# Altium PCB InfoDisplayPreAutoRoute.PcbDoc
Units mil, origin at the board's own origin, x right, y up, seen from the top; angles counter-clockwise.
Board outline 4606.3 x 1692.91 mil, 2 copper layers (Top Layer, Bottom Layer); 149 components, 160 nets, 533 pads, 74 vias.
Unrouted connection lines stored in the file: 27.
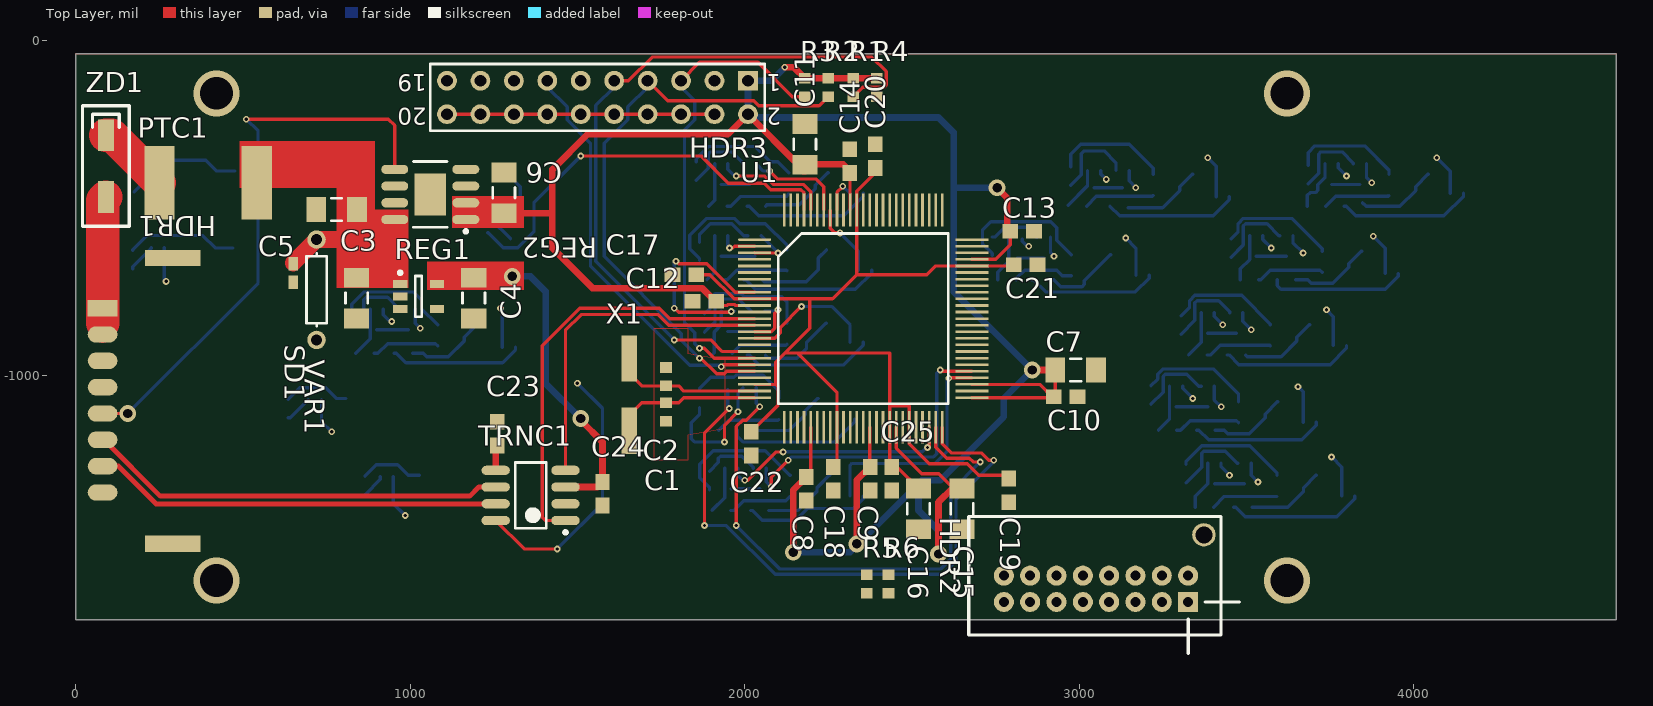
[diagram p0: Top Layer view]
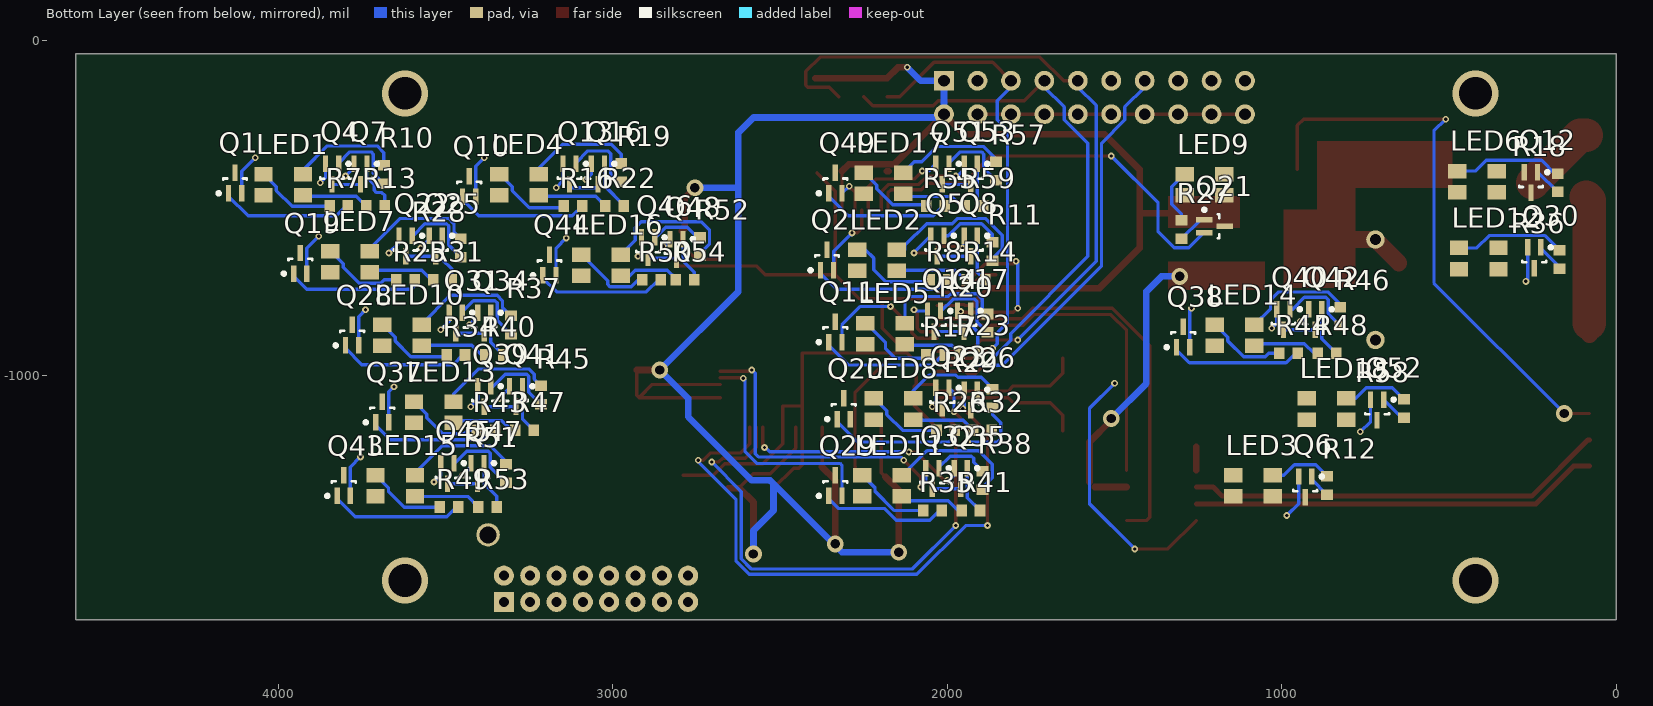
[diagram p1: Bottom Layer view, seen from below]

## Layer stack, top to bottom
Top Solder: solder mask 0.4, Solder Resist, Dk 3.5
Top Layer: signal copper 1.4
Dielectric 1: dielectric 12.6, FR-4, Dk 4.8
Bottom Layer: signal copper 1.4
Bottom Solder: solder mask 0.4, Solder Resist, Dk 3.5

## Board outline
0,-39.37 4606.3,-39.37 4606.3,-75 4606.3,-1732.28 0,-1732.28

## Design rules (kind name [scope] priority, off if disabled: settings)
Clearance [All] p1: gap=6
DiffPairsRouting [All] p1: maxlimit=10 minlimit=10 mostfreqgap=10 toplayer_minwidth=15 toplayer_maxwidth=15 toplayer_prefwidth=15 bottomlayer_minwidth=15 bottomlayer_maxwidth=15 bottomlayer_prefwidth=15 maxuncoupledlength=500
PolygonConnect [All] p1: connectstyle=Direct reliefconductorwidth=10 reliefentries=4 polygonreliefangle="90 Angle" airgapwidth=10
RoutingVias [All] p1: holewidth=10 width=20 viastyle="Through Hole" minholewidth=10 minwidth=20 maxholewidth=500 maxwidth=450
SolderMaskExpansion [All] p1: expansion=4
Width [All] p1: maxlimit=100 minlimit=10 preferedwidth=10
28 further rules are at their usual default settings.

## Classes and differential pairs
component class InfoDisplay: C1 C2 C3 C4 C5 C6 C7 C8 C9 C10 C11 C12 C13 C14 C15 C16 C17 C18 C19 C20 C21 C22 C23 C24 C25 HDR1 HDR2 HDR3 PTC1 R1 R2 R3 R4 R5 R6 REG1 REG2 SD1 TRNC1 U1 VAR1 X1 ZD1
component class InfoDisplayLEDs: LED1 LED2 LED3 LED4 LED5 LED6 LED7 LED8 LED9 LED10 LED11 LED12 LED13 LED14 LED15 LED16 LED17 LED18 Q1 Q2 Q4 Q5 Q6 Q7 Q8 Q10 Q11 Q12 Q13 Q14 Q16 Q17 Q19 Q20 Q21 Q22 Q23 Q25 Q26 Q28 Q29 Q30 Q31 Q32 Q34 Q35 Q37 Q38 Q39 Q40 Q41 Q42 Q43 Q44 Q45 Q46 Q47 Q48 Q49 Q51 Q52 Q53 R7 R8 R10 R11 R12 R13 R14 R16 R17 R18 R19 R20 R22 R23 R25 R26 R27 R28 R29 R31 R32 R34 R35 R36 R37 R38 R40 R41 R43 R44 R45 R46 R47 R48 R49 R50 R51 R52 R53 R54 R55 R57 R58 R59
differential pair CAR_CAN: +CAR_CAN_P -CAR_CAN_N

## Components (designator, comment, footprint, x,y, rotation, side; value= is the part's Value field where it differs from the comment)
C1 "Cap" 1608[0603] 1765,-1110 r90 top
C2 "Cap" 1608[0603] 1765,-1005 r270 top
C3 "Cap" CAPC3216M 840,-770 r270 top
C4 "Cap" CAPC3216M 1190,-770 r270 top
C5 "Cap" CAPC3216M 780,-505 r0 top
C6 "Cap" CAPC3216M 1280,-455 r90 top
C7 "Cap Pol1" CAPC3216M 2990,-985 r0 top
C8 "Cap" CAPC1608M 2185,-1340 r270 top
C9 "Cap" CAPC1608M 2375,-1310 r270 top
C10 "Cap" CAPC1608M 2960,-1065 r0 top
C11 "Cap Pol1" CAPC3216M 2180,-310 r90 top
C12 "Cap" CAPC1608M 1880,-780 r180 top
C13 "Cap" CAPC1608M 2830,-570 r0 top
C14 "Cap" CAPC1608M 2315,-360 r90 top
C15 "Cap Pol1" CAPC3216M 2650,-1400 r270 top
C16 "Cap Pol1" CAPC3216M 2520,-1400 r270 top
C17 "Cap" CAPC1608M 1820,-700 r180 top
C18 "Cap" CAPC1608M 2265,-1310 r270 top
C19 "Cap" CAPC1608M 2790,-1345 r270 top
C20 "Cap" CAPC1608M 2390,-345 r90 top
C21 "Cap" CAPC1608M 2840,-670 r0 top
C22 "Cap" CAPC1608M 2020,-1205 r270 top
C23 "Cap" CAPC1608M 1260,-1175 r270 top
C24 "Cap" CAPC1608M 1575,-1355 r270 top
C25 "Cap" CAPC1608M 2440,-1310 r270 top
HDR1 "Vehicle" Molex_DuraClick_8Pin_Vertical 80,-800 r270 top
HDR2 "Display" Molex_iGrid_16Pin_Vertical 3090,-1600 r180 top
HDR3 "JTAG" HDR2X10 2010,-120 r180 top
LED1 "LED" CLVBA-FKA-CAEDH8BBB7A363CT-ND 4045,-400 r180 bottom
LED2 "LED" CLVBA-FKA-CAEDH8BBB7A363CT-ND 2270,-625 r180 bottom
LED3 "LED" CLVBA-FKA-CAEDH8BBB7A363CT-ND 1145,-1300 r180 bottom
LED4 "LED" CLVBA-FKA-CAEDH8BBB7A363CT-ND 3340,-400 r180 bottom
LED5 "LED" CLVBA-FKA-CAEDH8BBB7A363CT-ND 2245,-845 r180 bottom
LED6 "LED" CLVBA-FKA-CAEDH8BBB7A363CT-ND 475,-390 r180 bottom
LED7 "LED" CLVBA-FKA-CAEDH8BBB7A363CT-ND 3845,-630 r180 bottom
LED8 "LED" CLVBA-FKA-CAEDH8BBB7A363CT-ND 2220,-1070 r180 bottom
LED9 "LED" CLVBA-FKA-CAEDH8BBB7A363CT-ND 1290,-400 r180 bottom
LED10 "LED" CLVBA-FKA-CAEDH8BBB7A363CT-ND 3690,-850 r180 bottom
LED11 "LED" CLVBA-FKA-CAEDH8BBB7A363CT-ND 2255,-1300 r180 bottom
LED12 "LED" CLVBA-FKA-CAEDH8BBB7A363CT-ND 470,-620 r180 bottom
LED13 "LED" CLVBA-FKA-CAEDH8BBB7A363CT-ND 3595,-1080 r180 bottom
LED14 "LED" CLVBA-FKA-CAEDH8BBB7A363CT-ND 1200,-850 r180 bottom
LED15 "LED" CLVBA-FKA-CAEDH8BBB7A363CT-ND 3710,-1300 r180 bottom
LED16 "LED" CLVBA-FKA-CAEDH8BBB7A363CT-ND 3095,-640 r180 bottom
LED17 "LED" CLVBA-FKA-CAEDH8BBB7A363CT-ND 2250,-395.43 r180 bottom
LED18 "LED" CLVBA-FKA-CAEDH8BBB7A363CT-ND 925,-1070 r180 bottom
PTC1 "0ZCF0200AF2C" 0ZCF0200AF2C 250,-425 r0 top
Q1 "MOSFET-N" SOT50P160X110-3N 4130,-430 r90 bottom
Q2 "MOSFET-N" SOT50P160X110-3N 2360,-660 r90 bottom
Q4 "MOSFET-N" SOT50P160X110-3N 3840,-395 r270 bottom
Q5 "MOSFET-N" SOT50P160X110-3N 2030,-610 r270 bottom
Q6 "MOSFET-N" SOT50P160X110-3N 930,-1330 r270 bottom
Q7 "MOSFET-N" SOT50P160X110-3N 3755,-395 r270 bottom
Q8 "MOSFET-N" SOT50P160X110-3N 1930,-610 r270 bottom
Q10 "MOSFET-N" SOT50P160X110-3N 3430,-440 r90 bottom
Q11 "MOSFET-N" SOT50P160X110-3N 2335,-875 r90 bottom
Q12 "MOSFET-N" SOT50P160X110-3N 255,-420 r270 bottom
Q13 "MOSFET-N" SOT50P160X110-3N 3130,-395 r270 bottom
Q14 "MOSFET-N" SOT50P160X110-3N 2040,-835 r270 bottom
Q16 "MOSFET-N" SOT50P160X110-3N 3045,-395 r270 bottom
Q17 "MOSFET-N" SOT50P160X110-3N 1950,-835 r270 bottom
Q19 "MOSFET-N" SOT50P160X110-3N 3935,-670 r90 bottom
Q20 "MOSFET-N" SOT50P160X110-3N 2310,-1105 r90 bottom
Q21 "MOSFET-N" SOT50P160X110-3N 1205,-555 r180 bottom
Q22 "MOSFET-N" SOT50P160X110-3N 3620,-610 r270 bottom
Q23 "MOSFET-N" SOT50P160X110-3N 2015,-1065 r270 bottom
Q25 "MOSFET-N" SOT50P160X110-3N 3530,-610 r270 bottom
Q26 "MOSFET-N" SOT50P160X110-3N 1930,-1070 r270 bottom
Q28 "MOSFET-N" SOT50P160X110-3N 3780,-885 r90 bottom
Q29 "MOSFET-N" SOT50P160X110-3N 2335,-1335 r90 bottom
Q30 "MOSFET-N" SOT50P160X110-3N 245,-645 r270 bottom
Q31 "MOSFET-N" SOT50P160X110-3N 3470,-840 r270 bottom
Q32 "MOSFET-N" SOT50P160X110-3N 2045,-1305 r270 bottom
Q34 "MOSFET-N" SOT50P160X110-3N 3385,-840 r270 bottom
Q35 "MOSFET-N" SOT50P160X110-3N 1960,-1305 r270 bottom
Q37 "MOSFET-N" SOT50P160X110-3N 3690,-1115 r90 bottom
Q38 "MOSFET-N" SOT50P160X110-3N 1295,-890 r90 bottom
Q39 "MOSFET-N" SOT50P160X110-3N 3385,-1060 r270 bottom
Q40 "MOSFET-N" SOT50P160X110-3N 995,-830 r270 bottom
Q41 "MOSFET-N" SOT50P160X110-3N 3290,-1060 r270 bottom
Q42 "MOSFET-N" SOT50P160X110-3N 900,-830 r270 bottom
Q43 "MOSFET-N" SOT50P160X110-3N 3805,-1335 r90 bottom
Q44 "MOSFET-N" SOT50P160X110-3N 3190,-675 r90 bottom
Q45 "MOSFET-N" SOT50P160X110-3N 3495,-1290 r270 bottom
Q46 "MOSFET-N" SOT50P160X110-3N 2895,-615 r270 bottom
Q47 "MOSFET-N" SOT50P160X110-3N 3405,-1290 r270 bottom
Q48 "MOSFET-N" SOT50P160X110-3N 2810,-620 r270 bottom
Q49 "MOSFET-N" SOT50P160X110-3N 2335,-430 r90 bottom
Q51 "MOSFET-N" SOT50P160X110-3N 2015,-395 r270 bottom
Q52 "MOSFET-N" SOT50P160X110-3N 715,-1100 r270 bottom
Q53 "MOSFET-N" SOT50P160X110-3N 1930,-395 r270 bottom
R1 "Res2" 1608[0603] 2325,-140 r90 top
R2 "Res2" 1608[0603] 2250,-140 r90 top
R3 "Res2" 1608[0603] 2180,-140 r90 top
R4 "Res2" 1608[0603] 2395,-140 r90 top
R5 "Res2" 1608[0603] 2365,-1625 r90 top
R6 "Res2" 1608[0603] 2430,-1625 r90 top
R7 "Res2" 1608[0603] 3820,-495 r0 bottom
R8 "Res2" 1608[0603] 2025,-715 r0 bottom
R10 "Res2" 1608[0603] 3685,-400 r90 bottom
R11 "Res2" 1608[0603] 1865,-630 r270 bottom
R12 "Res2" 1608[0603] 865,-1330 r90 bottom
R13 "Res2" 1608[0603] 3710,-495 r0 bottom
R14 "Res2" 1608[0603] 1915,-715 r0 bottom
R16 "Res2" 1608[0603] 3120,-495 r0 bottom
R17 "Res2" 1608[0603] 2035,-940 r0 bottom
R18 "Res2" 1608[0603] 175,-425 r90 bottom
R19 "Res2" 1608[0603] 2975,-395 r90 bottom
R20 "Res2" 1608[0603] 1880,-845 r90 bottom
R22 "Res2" 1608[0603] 2995,-495 r0 bottom
R23 "Res2" 1608[0603] 1935,-935 r0 bottom
R25 "Res2" 1608[0603] 3620,-715 r0 bottom
R26 "Res2" 1608[0603] 2005,-1165 r0 bottom
R27 "Res2" 1608[0603] 1300,-565 r90 bottom
R28 "Res2" 1608[0603] 3455,-620 r90 bottom
R29 "Res2" 1608[0603] 1865,-1070 r90 bottom
R31 "Res2" 1608[0603] 3510,-715 r0 bottom
R32 "Res2" 1608[0603] 1895,-1165 r0 bottom
R34 "Res2" 1608[0603] 3470,-940 r0 bottom
R35 "Res2" 1608[0603] 2045,-1405 r0 bottom
R36 "Res2" 1608[0603] 170,-655 r90 bottom
R37 "Res2" 1608[0603] 3305,-850 r90 bottom
R38 "Res2" 1608[0603] 1895,-1315 r270 bottom
R40 "Res2" 1608[0603] 3355,-940 r0 bottom
R41 "Res2" 1608[0603] 1930,-1405 r0 bottom
R43 "Res2" 1608[0603] 3380,-1165 r0 bottom
R44 "Res2" 1608[0603] 980,-935 r0 bottom
R45 "Res2" 1608[0603] 3215,-1060 r90 bottom
R46 "Res2" 1608[0603] 825,-825 r90 bottom
R47 "Res2" 1608[0603] 3265,-1165 r0 bottom
R48 "Res2" 1608[0603] 865,-935 r0 bottom
R49 "Res2" 1608[0603] 3490,-1395 r0 bottom
R50 "Res2" 1608[0603] 2885,-715 r0 bottom
R51 "Res2" 1608[0603] 3320,-1295 r90 bottom
R52 "Res2" 1608[0603] 2740,-615 r270 bottom
R53 "Res2" 1608[0603] 3375,-1395 r0 bottom
R54 "Res2" 1608[0603] 2785,-715 r0 bottom
R55 "Res2" 1608[0603] 2035,-495 r0 bottom
R57 "Res2" 1608[0603] 1855,-390 r90 bottom
R58 "Res2" 1608[0603] 635,-1100 r90 bottom
R59 "Res2" 1608[0603] 1920,-495 r0 bottom
REG1 "MCP1755" SOT95P270X145-5N 1025,-765 r0 top
REG2 "BD33GC0MEFJ-ME2CT-ND" TSOP127P600X100_HS-9M 1060,-460 r180 top
SD1 "UCLAMP0511PQTCT" CAPC1005M 650,-695 r90 top
TRNC1 "ATA6561" SOP127P600X165-8M 1360,-1360 r180 top
U1 "ATSAM3X8C" 100-LQFP 2030,-595 r0 top
VAR1 "" AXIAL-0.3 720,-745 r90 top
X1 "12MHz" XTAL 1655,-950 r270 top
ZD1 "DB2430100L" DB2430100L 90,-375 r90 top

## Footprints (in the part's own frame and the unit in brackets; to place one, negate y for a bottom-side part, rotate by r counter-clockwise, add the part's x,y. Pads: shape width x height; smd on the part's side, far side on the other; paste and mask are expansions set on the pad)
0ZCF0200AF2C [mm]
  rect 2.3x5.6 smd: 1(0,0) 2(7.4,0)
  body extent -0.1,-2.7 7.7,2.7, height 2.6
100-LQFP [mm] "Atmel SAM 3X8CA-AU"
  oval 2.5x0.2 smd: 1(0,0)
  rect 2.5x0.2 smd: 2(0,-0.5) 3(0,-1) 4(0,-1.5) 5(0,-2) 6(0,-2.5) 7(0,-3) 8(0,-3.5) 9(0,-4) 10(0,-4.5) 11(0,-5) 12(0,-5.5) 13(0,-6) 14(0,-6.5) 15(0,-7) 16(0,-7.5) 17(0,-8) 18(0,-8.5) 19(0,-9) 20(0,-9.5) 21(0,-10) 22(0,-10.5) 23(0,-11) 24(0,-11.5) 25(0,-12) 51(16.5,-12) 52(16.5,-11.5) 53(16.5,-11) 54(16.5,-10.5) 55(16.5,-10) 56(16.5,-9.5) 57(16.5,-9) 58(16.5,-8.5) 59(16.5,-8) 60(16.5,-7.5) 61(16.5,-7) 62(16.5,-6.5) 63(16.5,-6) 64(16.5,-5.5) 65(16.5,-5) 66(16.5,-4.5) 67(16.5,-4) 68(16.5,-3.5) 69(16.5,-3) 70(16.5,-2.5) 71(16.5,-2) 72(16.5,-1.5) 73(16.5,-1) 74(16.5,-0.5) 75(16.5,0)
  rect 0.2x2.5 smd: 26(2.25,-14.25) 27(2.75,-14.25) 28(3.25,-14.25) 29(3.75,-14.25) 30(4.25,-14.25) 31(4.75,-14.25) 32(5.25,-14.25) 33(5.75,-14.25) 34(6.25,-14.25) 35(6.75,-14.25) 36(7.25,-14.25) 37(7.75,-14.25) 38(8.25,-14.25) 39(8.75,-14.25) 40(9.25,-14.25) 41(9.75,-14.25) 42(10.25,-14.25) 43(10.75,-14.25) 44(11.25,-14.25) 45(11.75,-14.25) 46(12.25,-14.25) 47(12.75,-14.25) 48(13.25,-14.25) 49(13.75,-14.25) 50(14.25,-14.25) 76(14.25,2.25) 77(13.75,2.25) 78(13.25,2.25) 79(12.75,2.25) 80(12.25,2.25) 81(11.75,2.25) 82(11.25,2.25) 83(10.75,2.25) 84(10.25,2.25) 85(9.75,2.25) 86(9.25,2.25) 87(8.75,2.25) 88(8.25,2.25) 89(7.75,2.25) 90(7.25,2.25) 91(6.75,2.25) 92(6.25,2.25) 93(5.75,2.25) 94(5.25,2.25) 95(4.75,2.25) 96(4.25,2.25) 97(3.75,2.25) 98(3.25,2.25) 99(2.75,2.25) 100(2.25,2.25)
  silkscreen extent 1.79,-12.46 14.71,0.47, body extent 1.4,-12.95 15.11,0.89, height 1.6
1608[0603] [mm] "Chip Capacitor, Body 1.6x0.8mm, IPC High Density"
  rect 0.8x0.9 smd: 1(-0.7,0) 2(0.7,0)
  body extent -0.87,-0.48 0.87,0.48, height 1.3
AXIAL-0.3 [mm] "Axial Device, Thru-Hole; 2 Leads; 0.3 in Pin Spacing"
  round 1.4 hole 0.85: 1(-3.81,0) 2(3.81,0)
  silkscreen extent -2.77,-0.76 2.77,0.76
CAPC1005M [mm] "Chip Capacitor, Body 1.0x0.5mm, IPC Low Density"
  rect 1x0.7 smd: 1(-0.7,0) 2(0.7,0)
  body extent -0.55,-0.3 0.55,0.3, height 0.6
CAPC1608M [mm] "Chip Capacitor, Body 1.6x0.8mm, IPC Low Density"
  rect 1.2x1.1 smd: 1(-0.9,0) 2(0.9,0)
  body extent -0.87,-0.48 0.87,0.48, height 0.85
CAPC3216M [mm] "Chip Capacitor, Body 3.2x1.6mm, IPC Low Density"
  rect 1.5x1.9 smd: 1(-1.55,0) 2(1.55,0)
  silkscreen extent -0.4,-0.85 0.4,0.85, body extent -1.7,-0.9 1.7,0.9, height 1.35
CLVBA-FKA-CAEDH8BBB7A363CT-ND [mm] "3 Colour LED"
  rect 1.4x1.1 smd: 1(0,0) 2(0,-1.6) 3(3,-1.6) 4(3,0)
  body extent -0.13,-2.41 3.17,0.76, height 2.1
DB2430100L [mm] "DB24301"
  rect 2.4x1.2 smd: A(-2.35,0) K(2.35,0)
  silkscreen extent -4.57,-1.78 4.57,1.78, body extent -2.36,-0.71 2.34,0.71, height 0.85
HDR2X10 [mm] "Connector; Header; 10x2 Position"
  rect 1.5x1.5 hole 0.9: 1(0,0)
  round 1.5 hole 0.9: 2(0,2.54) 3(2.54,0) 4(2.54,2.54) 5(5.08,0) 6(5.08,2.54) 7(7.62,0) 8(7.62,2.54) 9(10.16,0) 10(10.16,2.54) 11(12.7,0) 12(12.7,2.54) 13(15.24,0) 14(15.24,2.54) 15(17.78,0) 16(17.78,2.54) 17(20.32,0) 18(20.32,2.54) 19(22.86,0) 20(22.86,2.54)
  silkscreen extent -1.27,-1.27 24.13,3.81
Molex_DuraClick_8Pin_Vertical [mm]
  rect 1.25x2.25 smd: A1(0,0)
  oval 1.25x2.25 smd: A2(2,0) A3(4,0) A4(6,0) A5(8,0) A6(10,0) A7(12,0) A8(14,0)
  rect 1.25x4.2 smd: CHAS(-3.81,5.334) CHAS(17.907,5.334)
  body extent -4.31,-1.02 18.28,8.13, height 7.97
Molex_iGrid_16Pin_Vertical [mil] "2.00mm Pitch iGrid™ Wire-to-Board Header, Dual Row, Vertical, with PCB Locator, 16 Circuits, Lead-Free"
  rect 60x60 hole 30: 1(-236.22,78.74)
  round 60 hole 30: 2(-236.22,0) 3(-157.48,78.74) 4(-157.48,0) 5(-78.74,78.74) 6(-78.74,0) 7(0,78.74) 8(0,0) 9(78.74,78.74) 10(78.74,0) 11(157.48,78.74) 12(157.48,0) 13(236.22,78.74) 14(236.22,0) 15(314.96,78.74) 16(314.96,0)
  round 70 hole 51.18: CHAS(-283.46,-122.05)
  silkscreen extent -390,-177 420,232, body extent -315,-161 394,161, height 482
SOP127P600X165-8M [mm] "SOP, 8-Leads, Body 4.90x3.90mm, Pitch 1.27mm, IPC Low Density"
  oval 2.15x0.7 smd: 1(-2.65,1.905) 2(-2.65,0.635) 3(-2.65,-0.635) 4(-2.65,-1.905) 5(2.65,-1.905) 6(2.65,-0.635) 7(2.65,0.635) 8(2.65,1.905)
  silkscreen extent -2.78,-2.5 1.18,2.93, body extent -2,-2.5 2,2.5, height 1.65
SOT50P160X110-3N [mm] "SOT23, 3-Leads, Body 1.60x1.60mm, Pitch 0.50mm, IPC Medium Density"
  rect 1.25x0.4 smd: 1(-0.675,0.5) 2(-0.675,-0.5) 3(0.889,0)
  silkscreen extent -0.8,-0.9 0.45,1.38, body extent -0.45,-0.9 0.45,0.9, height 1.1
SOT95P270X145-5N [mm] "SOT23, 5-Leads, Body 2.90x2.70mm, Pitch 0.95mm, IPC Medium Density"
  rect 1.1x0.6 smd: 1(-1.4,0.95) 2(-1.4,0) 3(-1.4,-0.95) 4(1.4,-0.95) 5(1.4,0.95)
  silkscreen extent -1.52,-1.55 0.25,1.92, body extent -0.9,-1.55 0.9,1.55, height 1.45
TSOP127P600X100_HS-9M [mm] "TSOP, 8-Leads, Body 4.90x3.90mm, Pitch 1.27mm, Thermal Pad 3.20.2x2.40.2mm, IPC Low Density"
  oval 2.05x0.7 smd: 1(-2.7,1.905) 2(-2.7,0.635) 3(-2.7,-0.635) 4(-2.7,-1.905) 5(2.7,-1.905) 6(2.7,-0.635) 7(2.7,0.635) 8(2.7,1.905)
  rect 2.4x3.2 smd: 9(0,0)
  silkscreen extent -2.83,-2.5 1.27,2.93, body extent -2,-2.5 2,2.5, height 1
XTAL [mm]
  rect 3.5x1.2 smd: 1(0,0) 2(5.5,0)
  body extent -0.89,-2.03 6.35,2.03, height 2.3

## Part data
C1 C2 C3 C4 C5 C6 C8 C9 C10 C12 C13 C14 C17 C18 C19 C20 C21 C22 C23 C24 C25: "Capacitor"
C7 C11 C15 C16: "Polarized Capacitor (Radial)"
HDR1: library part Molex_DuraClick_8Pin_Vertical
HDR2: library part Molex_iGrid_16Pin_Vertical
HDR3: library part "Header 10X2", "Header, 10-Pin, Dual row"
PTC1: "PTC device, 2A hold, 4A trip"
Q1 Q2 Q4 Q5 Q6 Q7 Q8 Q10 Q11 Q12 Q13 Q14 Q16 Q17 Q19 Q20 Q21 Q22 Q23 Q25 Q26 Q28 Q29 Q30 Q31 Q32 Q34 Q35 Q37 Q38 Q39 Q40 Q41 Q42 Q43 Q44 Q45 Q46 Q47 Q48 Q49 Q51 Q52 Q53: "N-Channel MOSFET"
R1 R2 R3 R4 R5 R6 R7 R8 R10 R11 R12 R13 R14 R16 R17 R18 R19 R20 R22 R23 R25 R26 R27 R28 R29 R31 R32 R34 R35 R36 R37 R38 R40 R41 R43 R44 R45 R46 R47 R48 R49 R50 R51 R52 R53 R54 R55 R57 R58 R59: "Resistor"
REG1: "Microchip 300 mA, 16V, High-Performance LDO"
U1: library part ATSAM3X8CA-AU
VAR1: library part "Res Varistor", "Varistor (Voltage-Sensitive Resistor)"
X1: library part XTAL, "Crystal Oscillator"

## Via types
v1: diameter 20, hole 10, Top Layer to Bottom Layer, 62 vias
v2: diameter 50, hole 28, Top Layer to Bottom Layer, 8 vias
v3: diameter 137.8, hole 98.43, Top Layer to Bottom Layer, 4 vias

## Nets (pads, with @x,y where several pads share a name; then routed paths per layer and width w, separated by ;. In a path a pad name is that pad's centre, name@x,y a point inside that pad or via, vN(x,y) a via of type N, cw(c..) or ccw(c..) an arc to the next point about the centre after c; other vN are vias at no path point)
3V3: C6.1 C7.1 C8.1 C9.1 C10.1 C11.1 C12.1 C13.1 C14.1 C15.1 C23.2 HDR2.15 HDR3.1 HDR3.2 LED1.2 LED2.2 LED3.2 LED4.2 LED5.2 LED6.2 LED7.2 LED8.2 LED9.2 LED10.2 LED11.2 LED12.2 LED13.2 LED14.2 LED15.2 LED16.2 LED17.2 LED18.2 R1.2 R2.2 R3.2 R4.2 REG2.1 REG2.2 TRNC1.5 U1.11 U1.30 U1.39 U1.43 U1.51 U1.53 U1.72 U1.90 | length 7897.5
  Top Layer w10: C12.1@1915.43,-790 1917.28,-791.85 1948.45,-791.85 1951.3,-789 1968.7,-789 1971.55,-791.85 U1.11 ; C8.1 2197.32,-1292.24 U1.30 ; U1.90@2315,-505.99 C14.1@2315,-390 ; U1.39 2374.49,-1274.05 C9.1 ; U1.43 2453.23,-1218.23 2530,-1295 2580,-1295 2623.98,-1338.98 C15.1@2655,-1338.98 ; U1.51 2922.13,-1067.44 2882.76,-1028.07 U1.53 ; U1.72 2750.95,-654.05 2794.57,-610.43 C13.1 ; C10.1 2928.98,-1060.59 C7.1
  Top Layer w20: TRNC1.5 C23.2@1255.67,-1214.76 ; C6.1@1261.02,-530 C6.1@1280,-511.02 ; C6.1 1420,-516.02 ; C12.1@1915.43,-790 1915.43,-782.96 1872.47,-740 1545,-740 1425,-620 1425,-385 1530,-280 1950,-280 HDR3.2 2160,-370 2295,-370 C14.1@2315,-390 ; v1(2120,-80) 2147.56,-80 R3.2 R4.2 ; v2(2145,-1530) 2145,-1344.57 C8.1 ; C11.1@2175,-391.02 C11.1@2180.64,-391.02 ; v2(2335,-1505) 2335,-1314.57 C9.1 ; v2(2580,-1535) 2580,-1380 2621.02,-1338.98 C15.1@2655,-1338.98 ; v2(2755,-440) 2785,-470 2785,-560.43 C13.1 ; v2(2860,-985) C7.1
  Bottom Layer w20: v1(2120,-80) 2080,-120 HDR3.1 HDR3.2 2020,-230 2580,-230 2625,-275 2625,-440 ; v2(2145,-1530) 2315,-1530 2520,-1325 ; v2(2580,-1535) 2580,-1465 2520,-1405 2520,-1325 ; v2(2755,-440) 2625,-440 ; 2520,-1325 2530,-1315 2585,-1315 2775,-1125 2775,-1070 v2(2860,-985) 2625,-750 2625,-440
5V0: C4.1 C24.1 REG1.5 TRNC1.3 | length 853.9
  Top Layer w20: TRNC1.3 C24.1@1559.57,-1335 ; v2(1510,-1130) 1510,-1135 1575,-1200 C24.1
  Bottom Layer w20: v2(1305,-705) 1360,-705 1405,-750 1405,-1025 v2(1510,-1130)
12V0: HDR1.A1 HDR1.A2 ZD1.A | length 415.4
  Top Layer w50: HDR1.A2 80,-845
  Top Layer w100: 80,-845 HDR1.A1 80,-477.52 ZD1.A
12V0S: C3.1 C5.2 PTC1.2 REG1.1 REG2.8 SD1.2 VAR1.2 | length 244.4
  Top Layer w50: SD1.2@650,-665 VAR1.2 830,-595 ; C5.2 C5.2@866.02,-530
  other v3: 421.26,-157.48
CAN_RECEIVE: TRNC1.4 U1.14 | length 1017.5
  Top Layer w10: TRNC1.4 1464.33,-865.67 1511,-819 1741.37,-819 1773.28,-850.9 U1.14
CAN_TRANSCEIVERWAKE: TRNC1.8 U1.17 | length 801.5
  Top Layer w10: TRNC1.8 1340.67,-1520 v1(1440,-1520)
  Bottom Layer w10: v1(1440,-1520) 1575,-1385 1575,-1100 v1(1500,-1025)
CAN_TRANSMIT: TRNC1.1 U1.13 | length 1280.6
  Top Layer w10: TRNC1.1 1405,-1435 1395,-1425 1395,-912.37 1507.37,-800 1745,-800 1776.22,-831.22 U1.13
CAR_CAN_N: HDR1.A6 TRNC1.6 | length 1256.8
  Top Layer w15: HDR1.A6 84.06,-1193.7 252.68,-1362.32 1177.68,-1362.32 1205,-1335 TRNC1.6
CAR_CAN_P: HDR1.A7 TRNC1.7 | length 1222.3
  Top Layer w15: HDR1.A7 127.44,-1272.44 240,-1385 TRNC1.7
CAR_WAKESIGNAL: HDR1.A5 REG2.5 | length 1713.7
  Top Layer w10: HDR1.A5 v2(155,-1114.96) ; v1(510,-235) 935,-235 953.7,-253.7 REG2.5
  Bottom Layer w10: v2(155,-1114.96) 545,-724.96 545,-270 v1(510,-235)
JTAG_SEL: R5.2 U1.35
JTAG_TCK: HDR3.9 R1.1 U1.18 | length 2164.2
  Top Layer w10: HDR3.9 1652.69,-120 1723.69,-49 2380.58,-49 2423.72,-92.14 2423.72,-132.74 2417.27,-139.19 2353.37,-139.19 R1.1 ; v1(1790,-895) 1899,-895 1933.64,-929.64 U1.18
  Bottom Layer w10: HDR3.9 1610,-138.94 1555,-193.94 1555,-660 v1(1790,-895)
JTAG_TDI: HDR3.5 R3.1 U1.19 | length 1460.2
  Top Layer w10: HDR3.5 1865,-65 2040,-65 2142.56,-167.56 R3.1 ; v1(1865,-920) 1880,-920 1909.33,-949.33 U1.19
  Bottom Layer w10: HDR3.5 1810,-138.94 1850.53,-179.47 1850.53,-236.79 1820.28,-267.03 1820.28,-843.28 1851,-874 1851,-906 v1(1865,-920)
JTAG_TDO: HDR3.13 U1.20 | length 1225.4
  Top Layer w10: v1(1930,-975) 1935.99,-969.01 U1.20
  Bottom Layer w10: HDR3.13 1410,-138.94 1469.47,-198.42 1469.47,-236.79 1539,-306.31 1539,-673.7 1836.3,-971 1926,-971 v1(1930,-975)
JTAG_TMS: HDR3.7 R2.1 U1.21 | length 1778.5
  Top Layer w10: HDR3.7 1769.47,-179.47 2026.79,-179.47 2042.31,-195 2222.56,-195 R2.1 ; v1(1865,-950) 1865,-945 1916,-996 1938.7,-996 1946,-988.7 U1.21
  Bottom Layer w10: HDR3.7 1710,-138.94 1650.53,-198.42 1650.53,-236.79 1580,-307.31 1580,-645 1811,-876 1811,-896 v1(1865,-950)
LED_B_BATTERY: Q26.2 U1.50 | length 1840.4
  Top Layer w10: v1(1880,-1450) 1880,-1174 v1(1954,-1100) ; U1.50 2591.02,-1206.02 2618,-1233 2707.7,-1233 2729.7,-1255 v1(2745,-1255)
  Bottom Layer w10: v1(1880,-1450) 1945.3,-1450 2091.3,-1596 2592.54,-1596 2632,-1556.54 2632,-1373 2745,-1260 v1(2745,-1255) ; Q26.2 1949.69,-1095.69 v1(1954,-1100)
LED_B_BRAKING: Q41.2 U1.58 | length 49.1
  Bottom Layer w10: Q41.2 3309.69,-1039.69 v1(3340,-1070)
LED_B_CHARGING: Q25.2 U1.67 | length 47.1
  Bottom Layer w10: Q25.2 3549.69,-594.69 v1(3575,-620)
LED_B_CLUTCH: Q35.2 U1.48 | length 698.3
  Top Layer w10: v1(2000,-1315) 2010,-1315 2095,-1230 v1(2115,-1230) ; v1(2546.88,-1216.88) 2551.65,-1212.11 U1.48
  Bottom Layer w10: Q35.2 1979.69,-1299.69 1995,-1315 v1(2000,-1315) ; v1(2115,-1230) 2116,-1229 2531,-1229 2543.12,-1216.88 v1(2546.88,-1216.88)
LED_B_DONE: Q48.2 U1.74 | length 32.9
  Bottom Layer w10: Q48.2 2829.69,-599.69 2845,-615 v1(2850,-615)
LED_B_ENERGIZED: Q34.2 U1.63 | length 47.1
  Bottom Layer w10: Q34.2 3404.69,-824.69 v1(3430,-850)
LED_B_ENGINE: Q17.2 U1.9 | length 602.1
  Top Layer w10: v1(1790,-800) 1802.65,-812.65 1957.35,-812.65 v1(1960,-810) ; v1(1795,-660) 1802.35,-667.35 1886.24,-667.35 1971.37,-752.48 U1.9
  Bottom Layer w10: v1(1790,-800) 1790,-665 v1(1795,-660) ; v1(1960,-810) 1961.57,-808.43 Q17.2
LED_B_FUEL: Q47.2 U1.87 | length 47.1
  Bottom Layer w10: Q47.2 3424.69,-1274.69 v1(3450,-1300)
LED_B_HYBRID: Q16.2 U1.84 | length 33.9
  Bottom Layer w10: Q16.2@3064.69,-388.43 3064.69,-399.69 3065.69,-399.69 v1(3081,-415)
LED_B_LOGGING: Q42.2 U1.4 | length 50
  Bottom Layer w10: Q42.2 919.69,-819.69 940,-840 v1(945,-840)
LED_B_MOTOR1: Q53.2 U1.96 | length 346
  Top Layer w10: v1(1975,-405) 2060,-405 2085,-430 2175,-430 2197.32,-452.32 U1.96
  Bottom Layer w10: Q53.2 1949.69,-384.69 1970,-405 v1(1975,-405)
LED_B_MOTOR2: Q8.2 U1.2 | length 116
  Top Layer w10: v1(1955,-620) 1965,-620 1970.32,-614.68 U1.2
  Bottom Layer w10: Q8.2 1949.69,-614.69 v1(1955,-620)
LED_B_READY: Q7.2 U1.81 | length 47.1
  Bottom Layer w10: Q7.2 3774.69,-379.69 v1(3800,-405)
LED_G_BATTERY: Q23.2 U1.49 | length 1697.6
  Top Layer w10: v1(1975,-1450) 1975,-1153.73 1993.79,-1134.94 2005.06,-1134.94 v1(2045,-1095) ; U1.49 2571.34,-1216.34 2604,-1249 2672.06,-1249 2683.06,-1260 v1(2705,-1260)
  Bottom Layer w10: v1(1975,-1450) 2105,-1580 2585.91,-1580 2616,-1549.91 2616,-1349 v1(2705,-1260) ; Q23.2 2034.69,-1084.69 v1(2045,-1095)
LED_G_BRAKING: Q39.2 U1.59 | length 70
  Bottom Layer w10: Q39.2 3404.69,-1074.69 v1(3425,-1095)
LED_G_CHARGING: Q22.2 U1.66 | length 64.1
  Bottom Layer w10: Q22.2 3639.69,-604.69 v1(3670,-635)
LED_G_CLUTCH: Q32.2 U1.55 | length 967.2
  Top Layer w10: v1(2080,-1335) 2080,-1305 v1(2130,-1255) ; v1(2585,-985) 2588.7,-988.7 U1.55
  Bottom Layer w10: Q32.2 2064.69,-1319.69 v1(2080,-1335) ; v1(2130,-1255) 2140,-1245 2565,-1245 2575,-1235 2575,-995 v1(2585,-985)
LED_G_DONE: Q46.2 U1.68 | length 60.8
  Bottom Layer w10: Q46.2 2914.69,-634.69 v1(2925,-645)
LED_G_ECONOMY: Q6.2 U1.8 | length 131.2
  Bottom Layer w10: Q6.2 949.69,-1384.69 v1(985,-1420)
LED_G_ENERGIZED: Q31.2 U1.62 | length 62.1
  Bottom Layer w10: Q31.2 3489.69,-839.69 v1(3515,-865)
LED_G_ENGINE: Q14.2 U1.15 | length 165
  Top Layer w10: U1.15 2079.02,-870.59 2090.21,-859.4 2090.21,-814.79 v1(2100,-805)
  Bottom Layer w10: Q14.2 2096.57,-808.43 v1(2100,-805)
LED_G_FUEL: Q45.2 U1.85 | length 65
  Bottom Layer w10: Q45.2 3514.69,-1299.69 v1(3535,-1320)
LED_G_HYBRID: Q13.2 U1.83 | length 60
  Bottom Layer w10: Q13.2@3149.69,-388.43 3149.69,-419.69 v1(3170,-440)
LED_G_LOGGING: Q40.2 U1.6 | length 62.9
  Bottom Layer w10: Q40.2 1014.69,-844.69 v1(1030,-860)
LED_G_MOTOR1: Q51.2 U1.94 | length 300
  Top Layer w10: v1(2075,-390) 2099,-414 2214,-414 2236.69,-436.69 U1.94
  Bottom Layer w10: Q51.2 2056.26,-390 v1(2075,-390)
LED_G_MOTOR2: Q5.2 U1.3 | length 142.7
  Top Layer w10: U1.3 2030.63,-635 v1(2100,-635)
  Bottom Layer w10: Q5.2 2100,-633.74 v1(2100,-635)
LED_G_PERFORMANCE: Q52.2 U1.7 | length 109.1
  Bottom Layer w10: Q52.2 734.69,-1139.69 v1(765,-1170)
LED_G_READY: Q4.2 U1.80 | length 62.9
  Bottom Layer w10: Q4.2 3859.69,-409.69 v1(3875,-425)
LED_R_BATTERY: Q20.2 U1.61
LED_R_BRAKING: Q37.2 U1.60 | length 112.9
  Bottom Layer w10: v1(3655,-1035) 3670.31,-1050.31 Q37.2
LED_R_CHARGING: Q19.2 U1.70 | length 126.2
  Bottom Layer w10: v1(3880,-585) 3915.31,-620.31 Q19.2
LED_R_CLUTCH: Q29.2 U1.54 | length 690
  Top Layer w10: v1(2610,-1010) 2611.62,-1008.38 U1.54
  Bottom Layer w10: Q29.2 2315.31,-1270 2320.92,-1264.39 2570.3,-1264.39 2605,-1229.7 2605,-1015 v1(2610,-1010)
LED_R_DONE: Q44.2 U1.65 | length 124.1
  Bottom Layer w10: v1(3140,-590) 3170.31,-620.31 Q44.2
LED_R_ENERGIZED: Q28.2 U1.64 | length 115
  Bottom Layer w10: v1(3740,-805) 3760.31,-825.31 Q28.2
LED_R_ENGINE: Q11.2 U1.16 | length 407.7
  Top Layer w10: U1.16 2089.73,-890.27 2106.21,-873.79 2106.21,-858.79 v1(2170,-795)
  Bottom Layer w10: v1(2170,-795) 2260,-795 2315.31,-850.31 Q11.2
LED_R_FAULT: Q12.2 U1.88
LED_R_FUEL: Q43.2 U1.57 | length 129.1
  Bottom Layer w10: v1(3755,-1245) 3785.31,-1275.31 Q43.2
LED_R_GROUND: Q21.2 U1.97 | length 1225.7
  Top Layer w10: v1(1510,-345) 1870,-345 1951,-426 2058.37,-426 2078.37,-446 2168.37,-446 2177.64,-455.27 U1.97
  Bottom Layer w10: Q21.2 1233.11,-574.69 1277.73,-619.31 1322.27,-619.31 1370,-571.58 1370,-485 v1(1510,-345)
LED_R_HYBRID: Q10.2 U1.69 | length 127.1
  Bottom Layer w10: v1(3385,-350) 3410.31,-375.31 Q10.2
LED_R_LOGGING: Q38.2 U1.5 | length 118.8
  Bottom Layer w10: v1(1270,-800) 1275.31,-805.31 Q38.2
LED_R_MOTOR1: Q49.2 U1.92 | length 109.3
  Top Layer w10: U1.92 2276.06,-453.94 2293.56,-436.44 v1(2293.56,-435.05)
  Bottom Layer w10: v1(2293.56,-435.05) 2293.61,-435 2293.74,-435 Q49.2
LED_R_MOTOR2: Q2.2 U1.93 | length 231.5
  Top Layer w10: U1.93 2256.38,-561.38 2270,-575 v1(2285,-575)
  Bottom Layer w10: v1@2285,-570 v1(2285,-575) 2285,-580 2290,-580 2340,-630 Q2.2@2340,-686.57
LED_R_READY: Q1.2 U1.82 | length 123.3
  Bottom Layer w10: v1(4070,-350) 4110.31,-390.31 Q1.2
LED_R_WARNING: Q30.2 U1.98 | length 103.8
  Bottom Layer w10: Q30.2 264.69,-714.69 v1(270,-720)
NetC16_1: C16.1 C17.1 C18.1 C19.1 C20.1 C21.1 C22.1 C25.1 U1.10 U1.23 U1.34 U1.42 U1.45 U1.71 U1.89 | length 3544.3
  Top Layer w10: C17.1 1896.27,-700 1968.43,-772.16 U1.10 2195,-772.16 ; C22.1 2100,-1089.57 2100,-1035 2093.07,-1028.07 ; U1.23 2093.07,-1028.07 ; 2159.49,-934.49 2276.06,-1051.06 U1.34 2276.06,-1273.5 C18.1@2275,-1274.57 ; C20.1@2390,-395.43 2335,-450.43 2335,-700 ; 2436.14,-1092.6 2492.6,-1092.6 U1.45 2492.6,-1205.04 2552.55,-1265 2665.43,-1265 2700.43,-1300 C19.1@2790,-1300 ; C16.1 2460,-1278.98 2444.41,-1278.98 C25.1 2433.54,-1268.11 U1.42 2433.54,-933.97 2121.03,-933.97 ; C21.1 2800.83,-673.74 U1.71 2571.26,-673.74 2545,-700 2335,-700 ; 2093.07,-1028.07 2093.07,-961.93 2121.03,-933.97 ; 2121.03,-933.97 2195,-860 2195,-772.16 ; 2195,-772.16 2262.84,-772.16 2335,-700
NetLED1_1: LED1.1 R7.2 | length 263.2
  Bottom Layer w10: LED1.1 4043.22,-400 4006.44,-436.78 4006.44,-448.21 3959.01,-495.65 R7.2@3858.2,-495.65 ; R7.2@3858.2,-495.65 3847.56,-485 3852.56,-490 R7.2@3858.2,-495.65
NetLED1_3: LED1.3 R13.2 | length 202.6
  Bottom Layer w10: R13.2 3766.95,-465.61 3924.28,-465.61 LED1.3
NetLED1_4: LED1.4 R10.2 | length 330.1
  Bottom Layer w10: R10.2 3685,-335 3705,-315 3854.3,-315 3926.89,-387.59 LED1.4
NetLED2_1: LED2.1 R8.2 | length 254.9
  Bottom Layer w10: R8.2 2058.2,-720.65 2184.35,-720.65 2220,-685 2220,-650 LED2.1@2245,-625
NetLED2_3: LED2.3 R14.2 | length 196.9
  Bottom Layer w10: R14.2 1948.42,-715 1977.14,-686.28 2125.18,-686.28 LED2.3@2126.89,-687.99
NetLED2_4: LED2.4 R11.2 | length 457
  Bottom Layer w10: R11.2 1865,-651.46 1836.28,-622.75 1836.28,-582.14 1886.6,-531.82 1968.74,-531.82 1984.74,-547.82 2062.12,-547.82 LED2.4@2126.89,-612.59 ; LED2.4@2126.89,-612.59 2126.89,-625 LED2.4@2126.89,-612.59
NetLED3_4: LED3.4 R12.2 | length 190.6
  Bottom Layer w10: R12.2 865,-1300.7 897.88,-1267.82 962.12,-1267.82 994.3,-1300 LED3.4
NetLED4_1: LED4.1 R16.2 | length 342.6
  Bottom Layer w10: LED4.1 3338.22,-400 3301.44,-436.78 3301.44,-448.21 3249.65,-500 ; 3249.65,-500 3147.56,-500 3249.65,-500
NetLED4_3: LED4.3 R22.2 | length 212.6
  Bottom Layer w10: R22.2 3051.95,-465.61 3219.28,-465.61 LED4.3
NetLED4_4: LED4.4 R19.2 | length 382.1
  Bottom Layer w10: LED4.4 3221.89,-381.89 3150,-310 3005,-310 2975,-340 ; 2975,-340 2975,-377.44 R19.2 2975,-340
NetLED5_1: LED5.1 R17.2 | length 241.8
  Bottom Layer w10: R17.2 2062.56,-942.26 2070.3,-950 2155.9,-950 2185,-920.9 2185,-903.22 2243.22,-845 LED5.1
NetLED5_3: LED5.3 R23.2 | length 175.5
  Bottom Layer w10: R23.2 1963.42,-935 1987.14,-911.28 2123.6,-911.28 LED5.3
NetLED5_4: LED5.4 R20.2 | length 362.7
  Bottom Layer w10: R20.2 1895.44,-802 1895.44,-772.64 1911.26,-756.82 1988.74,-756.82 1996.92,-765 2110,-765 2126.89,-781.89 LED5.4
NetLED6_1: LED6.1 R18.2 | length 330.1
  Bottom Layer w10: R18.2 183.26,-397.44 223.36,-357.35 389.01,-357.35 421.66,-390 LED6.1
NetLED7_1: LED7.1 R25.2 | length 248.2
  Bottom Layer w10: R25.2 3684.13,-715 3694.77,-725.65 3759.01,-725.65 3806.44,-678.21 3806.44,-666.78 3843.22,-630 LED7.1
NetLED7_3: LED7.3 R31.2 | length 204
  Bottom Layer w10: R31.2 3543.42,-715 3572.14,-686.28 3720.18,-686.28 LED7.3
NetLED7_4: LED7.4 R28.2 | length 356.3
  Bottom Layer w10: R28.2 3475.44,-572 3475.44,-547.64 3491.26,-531.82 3636.12,-531.82 3726.89,-622.59 LED7.4
NetLED8_1: LED8.1 R26.2 | length 234
  Bottom Layer w10: R26.2 2033.2,-1165.65 2134.01,-1165.65 2181.44,-1118.21 2181.44,-1106.78 2218.22,-1070 LED8.1
NetLED8_3: LED8.3 R32.2 | length 192.6
  Bottom Layer w10: R32.2 1951.95,-1135.61 2099.28,-1135.61 LED8.3
NetLED8_4: LED8.4 R29.2 | length 298
  Bottom Layer w10: R29.2 1865,-1040.7 1898.7,-1007 1967.7,-1007 1974.7,-1000 2055,-1000 2101.89,-1046.89 LED8.4
NetLED9_1: LED9.1 R27.2 | length 166.3
  Bottom Layer w10: LED9.1 1291.78,-400 1328.56,-436.78 1328.56,-489.2 1300,-517.76 R27.2
NetLED10_1: LED10.1 R34.2 | length 241.1
  Bottom Layer w10: R34.2 3503.2,-945.65 3604.01,-945.65 3651.44,-898.21 3651.44,-886.78 3688.22,-850 LED10.1
NetLED10_3: LED10.3 R40.2 | length 201.9
  Bottom Layer w10: R40.2 3393.42,-940 3422.14,-911.28 3570.18,-911.28 LED10.3
NetLED10_4: LED10.4 R37.2 | length 341.3
  Bottom Layer w10: R37.2 3330.44,-797 3330.44,-777.64 3346.26,-761.82 3486.12,-761.82 3571.89,-847.59 LED10.4
NetLED11_1: LED11.1 R35.2 | length 232.6
  Bottom Layer w10: R35.2 2159.65,-1405 2216.44,-1348.21 2216.44,-1336.78 2253.22,-1300 LED11.1
NetLED11_3: LED11.3 R41.2 | length 196.7
  Bottom Layer w10: R41.2 1968.42,-1405 1997.14,-1376.28 2123.6,-1376.28 LED11.3
NetLED11_4: LED11.4 R38.2 | length 404.9
  Bottom Layer w10: R38.2 1895,-1336.46 1866.28,-1307.75 1866.28,-1267.14 1906.6,-1226.82 2061.12,-1226.82 2134.3,-1300 LED11.4
NetLED12_1: LED12.1 R36.2 | length 334.9
  Bottom Layer w10: R36.2 170,-625.7 212.88,-582.82 379.48,-582.82 416.66,-620 LED12.1
NetLED13_1: LED13.1 R43.2 | length 238.2
  Bottom Layer w10: R43.2 3434.13,-1165 3444.77,-1175.65 3509.01,-1175.65 3556.44,-1128.21 3556.44,-1116.78 3593.22,-1080 LED13.1
NetLED13_3: LED13.3 R47.2 | length 199
  Bottom Layer w10: R47.2 3303.42,-1165 3332.14,-1136.28 3470.18,-1136.28 LED13.3
NetLED13_4: LED13.4 R45.2 | length 345.1
  Bottom Layer w10: R45.2 3235.44,-1012 3235.44,-997.64 3251.26,-981.82 3401.12,-981.82 3476.89,-1057.59 LED13.4
NetLED14_1: LED14.1 R44.2 | length 243.2
  Bottom Layer w10: R44.2 1039.13,-935 1049.77,-945.65 1114.01,-945.65 1161.44,-898.21 1161.44,-886.78 1198.22,-850 LED14.1
NetLED14_3: LED14.3 R48.2 | length 204
  Bottom Layer w10: R48.2 903.42,-935 932.14,-906.28 1075.18,-906.28 LED14.3
NetLED14_4: LED14.4 R46.2 | length 338
  Bottom Layer w10: R46.2 825,-788.08 861.26,-751.82 1011.12,-751.82 1033.56,-774.26 1033.56,-801.67 LED14.4
NetLED15_1: LED15.1 R49.2 | length 239
  Bottom Layer w10: R49.2 3518.2,-1395.65 3624.01,-1395.65 3671.44,-1348.21 3671.44,-1336.78 3708.22,-1300 LED15.1
NetLED15_3: LED15.3 R53.2 | length 202.6
  Bottom Layer w10: R53.2 3434.57,-1362.99 LED15.3
NetLED15_4: LED15.4 R51.2 | length 341.3
  Bottom Layer w10: R51.2 3320,-1258.08 3366.26,-1211.82 3511.12,-1211.82 3591.89,-1292.59 LED15.4
NetLED16_1: LED16.1 R50.2 | length 237.3
  Bottom Layer w10: R50.2 2924.13,-715 2944.77,-735.65 3009.01,-735.65 3015.45,-729.2 3015.45,-717.77 3093.22,-640 LED16.1
NetLED16_3: LED16.3 R54.2 | length 185.6
  Bottom Layer w10: R54.2 2812.56,-710.86 2837.14,-686.28 2932.86,-686.28 2949.57,-702.99 LED16.3
NetLED16_4: LED16.4 R52.2 | length 426
  Bottom Layer w10: R52.2 2740,-636.46 2711.28,-607.75 2711.28,-567.14 2736.6,-541.82 2916.12,-541.82 2933.56,-559.26 2933.56,-596.67 LED16.4
NetLED17_1: LED17.1 R55.2 | length 235.4
  Bottom Layer w10: R55.2 2066.48,-491.08 2164.01,-491.08 2211.44,-443.64 2211.44,-432.22 2248.22,-395.43 LED17.1
NetLED17_3: LED17.3 R59.2 | length 199.5
  Bottom Layer w10: R59.2 1958.42,-495 1987.14,-466.28 2124.03,-466.28 LED17.3
NetLED17_4: LED17.4 R57.2 | length 333.8
  Bottom Layer w10: R57.2 1855,-353.08 1891.26,-316.82 2031.12,-316.82 2076.74,-362.44 2098.9,-362.44 LED17.4
NetLED18_4: LED18.4 R58.2 | length 199.6
  Bottom Layer w10: R58.2 669.62,-1037.82 747.12,-1037.82 779.3,-1070 LED18.4
NetPTC1_1: PTC1.1 ZD1.K | length 219
  Top Layer w100: ZD1.K 107.48,-282.48 PTC1.1
NetQ1_1: Q1.1 R7.1 | length 402
  Bottom Layer w10: R7.1 3798.54,-495 3827.25,-523.72 4091.21,-523.72 4149.69,-465.24 Q1.1
NetQ2_1: Q2.1 R8.1 | length 422.9
  Bottom Layer w10: R8.1 2003.54,-715 2032.25,-743.72 2331.21,-743.72 2379.69,-695.24 Q2.1
NetQ4_1: Q4.1 R10.1 | length 224
  Bottom Layer w10: R10.1 3716.44,-396.12 3716.44,-339.26 3722.88,-332.82 3787.12,-332.82 3820.32,-366.02 Q4.1
NetQ5_1: Q5.1 R11.1 | length 195.4
  Bottom Layer w10: R11.1 1865,-580.7 1897.88,-547.82 1962.12,-547.82 1997.72,-583.43 Q5.1
NetQ6_1: Q6.1 R12.1 | length 72.9
  Bottom Layer w10: R12.1 910.32,-1312.24 Q6.1
NetQ7_1: Q7.1 R13.1 | length 158.2
  Bottom Layer w10: R13.1 3682.44,-462.56 3690.69,-454.31 3707.27,-454.31 3713.72,-447.86 3713.72,-431.28 3735.32,-409.68 Q7.1
NetQ8_1: Q8.1 R14.1 | length 141
  Bottom Layer w10: R14.1 1910.32,-692.13 Q8.1
NetQ10_1: Q10.1 R16.1 | length 397.9
  Bottom Layer w10: R16.1 3121.16,-523.72 3401.21,-523.72 3449.69,-475.24 Q10.1
NetQ11_1: Q11.1 R17.1 | length 393.1
  Bottom Layer w10: R17.1 2013.54,-940 2043.54,-970 2294.93,-970 2354.69,-910.24 Q11.1
NetQ12_1: Q12.1 R18.1 | length 84.8
  Bottom Layer w10: R18.1 234.13,-393.43 Q12.1
NetQ13_1: Q13.1 R19.1 | length 316.6
  Bottom Layer w10: Q13.1 3110.32,-388.43 3110.32,-365.31 3075,-330 3015,-330 3006.44,-338.56 3006.44,-401.12 ; 3006.44,-401.12 2975,-432.56 2980,-427.56 3006.44,-401.12
NetQ14_1: Q14.1 R20.1 | length 232.6
  Bottom Layer w10: R20.1 1911.44,-841.12 1911.44,-779.26 1917.88,-772.82 1982.12,-772.82 2017.72,-808.43 Q14.1
NetQ16_1: Q16.1 R22.1 | length 128.1
  Bottom Layer w10: R22.1@2967.44,-492.56 3025.32,-434.68 Q16.1@3025.32,-388.43
NetQ17_1: Q17.1 R23.1 | length 136
  Bottom Layer w10: R23.1 1908.72,-933.73 1908.72,-871.28 1930.32,-849.68 Q17.1
NetQ19_1: Q19.1 R25.1 | length 409
  Bottom Layer w10: R25.1 3592.44,-732.44 3603.72,-743.72 3916.21,-743.72 3954.69,-705.24 Q19.1
NetQ20_1: Q20.1 R26.1 | length 410.4
  Bottom Layer w10: R26.1 1977.44,-1182.44 1995,-1200 2269.93,-1200 2329.69,-1140.24 Q20.1
NetQ21_1: Q21.1 R27.1 | length 92.1
  Bottom Layer w10: Q21.1 1242.76,-535.31 R27.1
NetQ22_1: Q22.1 R28.1 | length 234.7
  Bottom Layer w10: R28.1 3491.44,-611.12 3491.44,-554.26 3497.88,-547.82 3562.12,-547.82 3597.72,-583.43 Q22.1
NetQ23_1: Q23.1 R29.1 | length 390.9
  Top Layer w10: v1(1940,-1200) 1940,-1150 v1(1980,-1110)
  Bottom Layer w10: R29.1 1865,-1118.42 1840.69,-1142.73 1840.69,-1190.69 1850,-1200 v1(1940,-1200) ; v1(1980,-1110) 1980,-1053.74 Q23.1
NetQ25_1: Q25.1 R31.1 | length 143.1
  Bottom Layer w10: R31.1 3482.44,-682.56 3510.32,-654.68 Q25.1
NetQ26_1: Q26.1 R32.1
NetQ28_1: Q28.1 R34.1 | length 397.9
  Bottom Layer w10: R34.1 3448.54,-940 3477.25,-968.72 3751.21,-968.72 3799.69,-920.24 Q28.1
NetQ29_1: Q29.1 R35.1 | length 384.1
  Bottom Layer w10: R35.1 2023.54,-1405 2052.25,-1433.72 2153.56,-1433.72 2188.28,-1399 2325.93,-1399 2354.69,-1370.24 Q29.1
NetQ30_1: Q30.1 R36.1 | length 87
  Bottom Layer w10: R36.1 170,-676.46 225.32,-621.15 Q30.1
NetQ31_1: Q31.1 R37.1 | length 233.2
  Bottom Layer w10: R37.1 3346.44,-836.12 3346.44,-784.26 3352.88,-777.82 3417.12,-777.82 3450.32,-811.02 Q31.1
NetQ32_1: Q32.1 R38.1 | length 171.8
  Bottom Layer w10: R38.1 1921.44,-1261 1921.44,-1249.26 1927.88,-1242.82 1992.12,-1242.82 2025.32,-1276.02 Q32.1
NetQ34_1: Q34.1 R40.1 | length 142.3
  Bottom Layer w10: R40.1 3365.32,-902.13 Q34.1
NetQ35_1: Q35.1 R41.1 | length 142.3
  Bottom Layer w10: R41.1 1940.32,-1367.13 Q35.1
NetQ37_1: Q37.1 R43.1 | length 395.8
  Bottom Layer w10: R43.1 3358.54,-1165 3387.25,-1193.72 3666.21,-1193.72 3709.69,-1150.24 Q37.1
NetQ38_1: Q38.1 R44.1 | length 398.7
  Bottom Layer w10: R44.1 958.54,-935 987.25,-963.72 1276.21,-963.72 1314.69,-925.24 Q38.1
NetQ39_1: Q39.1 R45.1 | length 229.7
  Bottom Layer w10: R45.1 3251.44,-1051.12 3251.44,-1004.26 3257.88,-997.82 3322.12,-997.82 3357.72,-1033.43 Q39.1
NetQ40_1: Q40.1 R46.1 | length 224.7
  Bottom Layer w10: R46.1 861.44,-816.12 861.44,-774.26 867.88,-767.82 932.12,-767.82 967.72,-803.43 Q40.1
NetQ41_1: Q41.1 R47.1 | length 145.2
  Bottom Layer w10: R47.1 3270.32,-1132.13 Q41.1
NetQ42_1: Q42.1 R48.1 | length 149.3
  Bottom Layer w10: R48.1 880.32,-892.13 Q42.1
NetQ43_1: Q43.1 R49.1 | length 405
  Bottom Layer w10: R49.1 3468.54,-1395 3497.25,-1423.72 3771.21,-1423.72 3824.69,-1370.24 Q43.1
NetQ44_1: Q44.1 R50.1 | length 393.2
  Bottom Layer w10: R50.1 2863.54,-715 2900.18,-751.65 3168.28,-751.65 3209.69,-710.24 Q44.1
NetQ45_1: Q45.1 R51.1 | length 233.8
  Bottom Layer w10: R51.1 3366.44,-1276.12 3366.44,-1234.26 3372.88,-1227.82 3437.12,-1227.82 3472.72,-1263.43 Q45.1
NetQ46_1: Q46.1 R52.1 | length 160.3
  Bottom Layer w10: R52.1 2748.26,-587.44 2777.88,-557.82 2842.12,-557.82 2872.72,-588.43 Q46.1
NetQ47_1: Q47.1 R53.1 | length 147.3
  Bottom Layer w10: R53.1 3347.44,-1362.56 3385.32,-1324.68 Q47.1
NetQ48_1: Q48.1 R54.1 | length 135.2
  Bottom Layer w10: R54.1 2757.44,-692.56 2790.32,-659.68 Q48.1
NetQ49_1: Q49.1 R55.1 | length 392
  Bottom Layer w10: R55.1 2013.54,-495 2042.25,-523.72 2296.21,-523.72 2354.69,-465.24 Q49.1
NetQ51_1: Q51.1 R57.1 | length 216.1
  Bottom Layer w10: R57.1 1891.44,-381.12 1891.44,-339.26 1897.88,-332.82 1962.12,-332.82 1995.32,-366.02 Q51.1
NetQ52_1: Q52.1 R58.1 | length 82.7
  Bottom Layer w10: R58.1 641.18,-1127.56 Q52.1
NetQ53_1: Q53.1 R59.1 | length 134
  Bottom Layer w10: R59.1 1910.32,-477.13 Q53.1
OLED_BS0: C1.1 C2.1 C3.2 C4.2 C5.1 C6.2 C7.2 C8.2 C9.2 C10.2 C11.2 C12.2 C13.2 C14.2 C15.2 C16.2 C17.2 C18.2 C19.2 C20.2 C21.2 C22.2 C23.1 C24.2 C25.2 HDR1.A3 HDR1.A4 HDR2.1 HDR2.2 HDR2.5 HDR2.6 HDR2.7 HDR2.8 HDR2.9 HDR2.12 HDR2.13 HDR2.16 HDR3.4 HDR3.6 HDR3.8 HDR3.10 HDR3.12 HDR3.14 HDR3.16 HDR3.18 HDR3.20 Q1.3 Q2.3 Q4.3 Q5.3 Q6.3 Q7.3 Q8.3 Q10.3 Q11.3 Q12.3 Q13.3 Q14.3 Q16.3 Q17.3 Q19.3 Q20.3 Q21.3 Q22.3 Q23.3 Q25.3 Q26.3 Q28.3 Q29.3 Q30.3 Q31.3 Q32.3 Q34.3 Q35.3 Q37.3 Q38.3 Q39.3 Q40.3 Q41.3 Q42.3 Q43.3 Q44.3 Q45.3 Q46.3 Q47.3 Q48.3 Q49.3 Q51.3 Q52.3 Q53.3 R5.1 R6.1 REG1.2 REG1.4 REG2.3 REG2.9 SD1.1 TRNC1.2 U1.12 U1.22 U1.33 U1.41 U1.44 U1.52 U1.73 U1.91 U1.95 VAR1.1 | length 1865
  Top Layer w10: HDR3.20 HDR3.18 HDR3.16 HDR3.14 HDR3.12 HDR3.10 HDR3.8 HDR3.6 HDR3.4
  Bottom Layer w10: Q42.3 Q40.3 ; Q8.3 Q5.3 ; Q53.3 Q51.3 ; Q17.3 Q14.3 ; Q35.3 Q32.3 ; Q48.3@2815,-650 Q46.3 ; Q16.3@3045,-440 Q13.3@3130,-440 ; Q41.3 Q39.3 ; Q34.3 Q31.3 ; Q47.3 Q45.3 ; Q25.3 Q22.3 ; Q7.3 Q4.3
  other v3: 421.26,-1614.17 3622.05,-1614.17 3622.05,-157.48
OLED_CS: HDR2.3 U1.78
OLED_DC: HDR2.14 U1.56
OLED_RES: HDR2.4
OLED_SCLK: HDR2.11 U1.77
OLED_SDIN: HDR2.10 U1.76
PWR_REGULATORWAKE: REG1.3 U1.86
SAM_FWUP: R4.1 U1.40
SAM_TST: R6.2 U1.38
XIN: C1.2 U1.25 X1.2 | length 443.3
  Top Layer w10: X1.2 1655,-1120 1692.56,-1082.44 1802.56,-1082.44 1817.56,-1067.44 U1.25
XOUT: C2.2 U1.24 X1.1 | length 441.9
  Top Layer w10: X1.1 1655,-995 1692.56,-1032.56 1802.56,-1032.56 1817.75,-1047.75 U1.24
pads on no net: HDR1.A8 HDR1.CHAS HDR2.CHAS HDR3.3 HDR3.11 HDR3.15 HDR3.17 HDR3.19 LED3.1 LED3.3 LED6.3 LED6.4 LED9.3 LED9.4 LED12.3 LED12.4 LED18.1 LED18.3 REG2.4 REG2.6 REG2.7 U1.1 U1.26 U1.27 U1.28 U1.29 U1.31 U1.32 U1.36 U1.37 U1.46 U1.47 U1.75 U1.79 U1.99 U1.100

## Polygon pours and split planes (outlines as drawn)
OLED_BS0 on Top Layer "GND_PLANE" (solid, shelved, pour order 2): 0,-39.37 4606.3,-39.37 4606.3,-1732.28 0,-1732.28
OLED_BS0 on Top Layer "Top Layer-No Net" (solid, shelved, pour order 3): 1730,-860 1830,-860 1830,-935 1940,-955 1940,-1160 1830,-1180 1830,-1255 1730,-1255

## Other copper
Top Layer:
  region net 12V0S: 995,-505 780,-505 780,-740 995,-740
  region net 3V3: 1340,-465 1125,-465 1125,-560 1340,-560
  region net 12V0S: 895,-315 780,-315 780,-555 895,-555
  region net 5V0: 1340,-660 1050,-660 1050,-745 1340,-745
  rectangle net 12V0S: 490,-440 895,-300

## Text inside footprints (layer, text, board x,y; h text height)
HDR3: Top Overlay "2" at 2110,-200 h50 r180; Top Overlay "1" at 2110,-100 h50 r180; Top Overlay "19" at 1050,-100 h50 r180; Top Overlay "20" at 1050,-200 h50 r180